# Altium PCB PCB_IR.PcbDoc
Units mm, origin at the board's own origin, x right, y up, seen from the top; angles counter-clockwise.
Board outline 74.42 x 67.06 mm, 2 copper layers (Top Layer, Bottom Layer); 11 components, 8 nets, 64 pads, 0 vias.
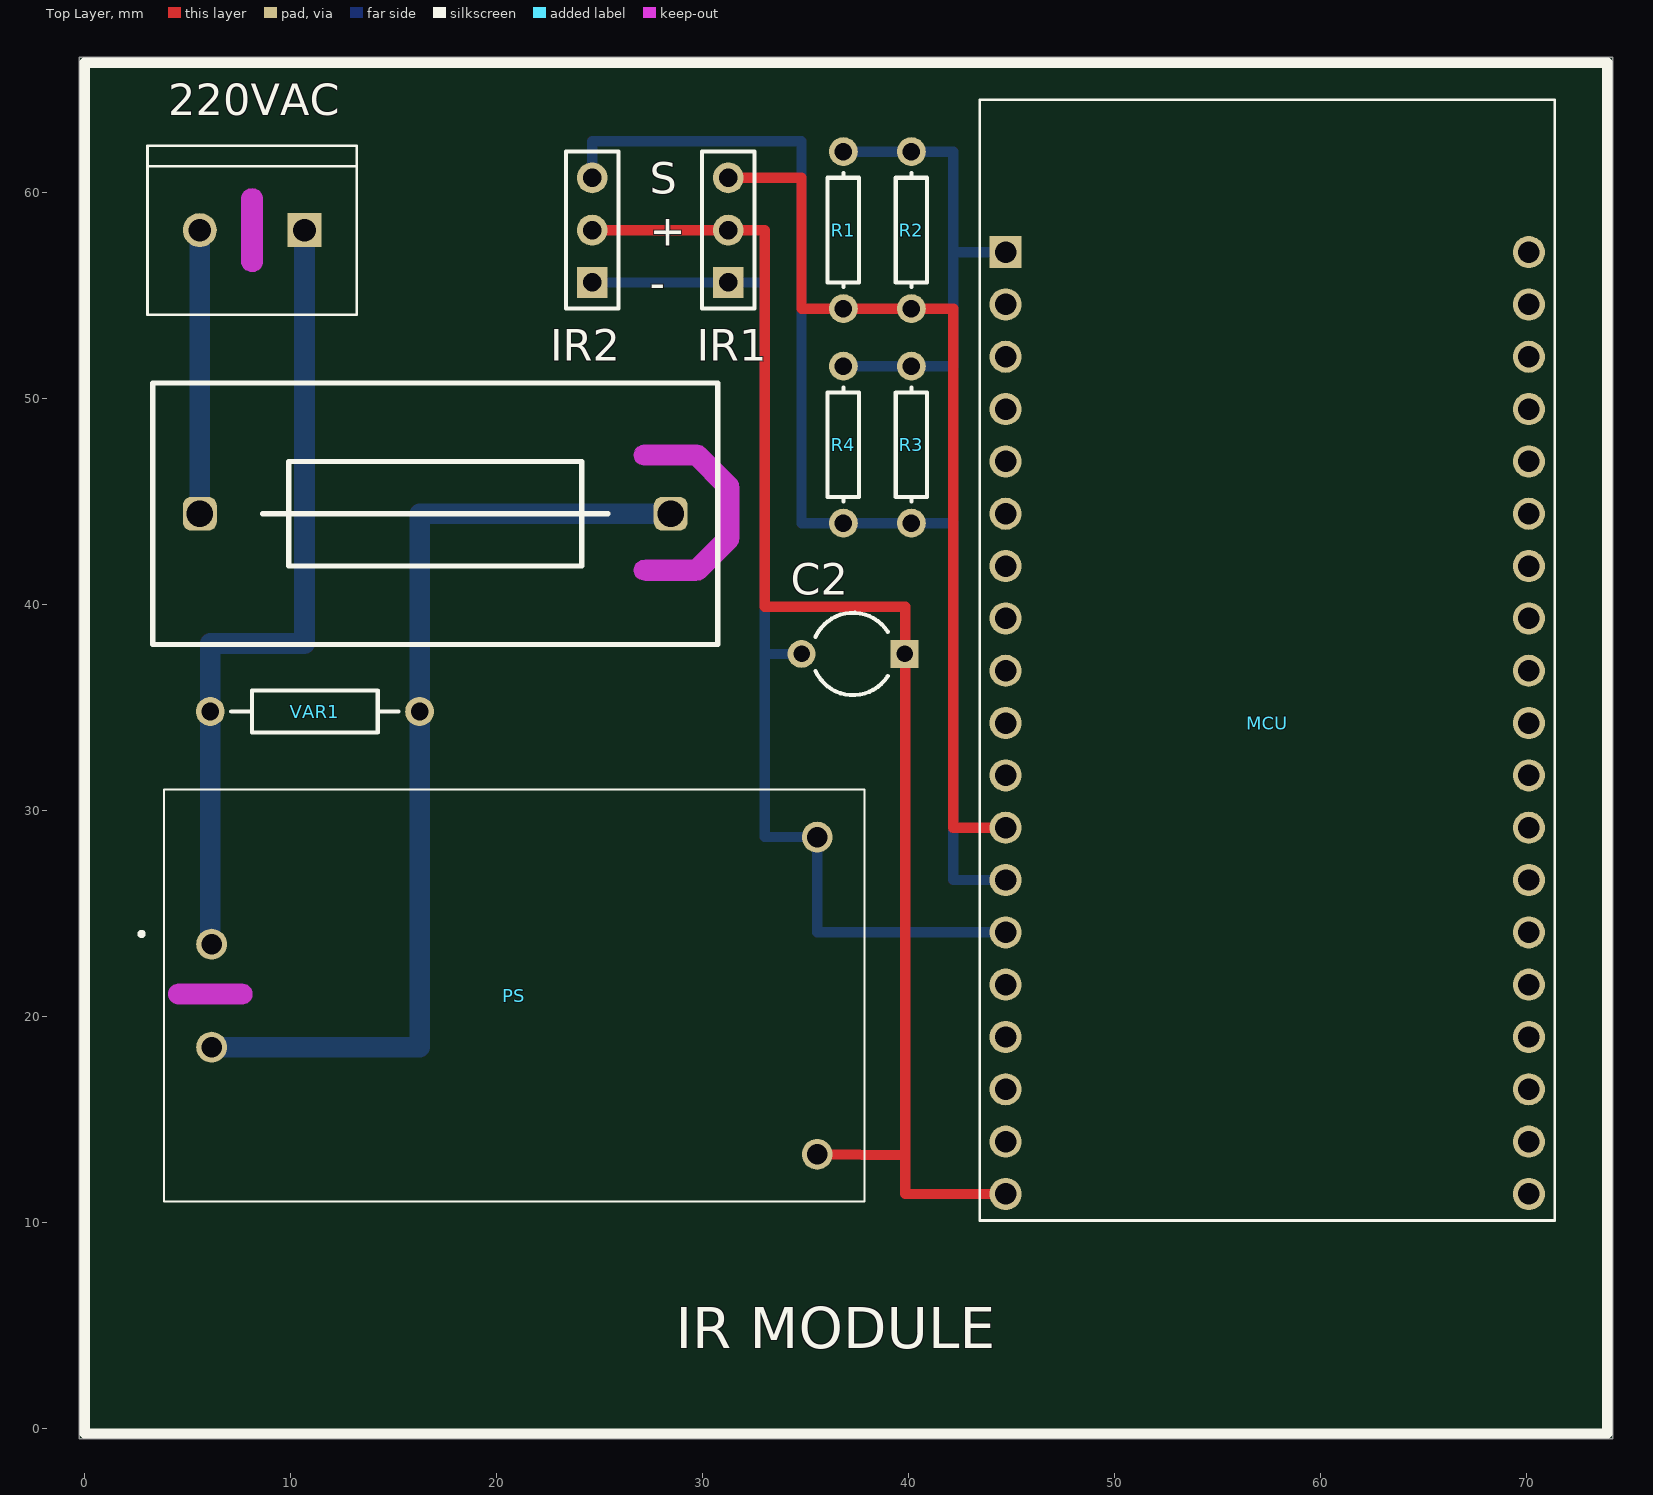
[diagram p0: Top Layer view]
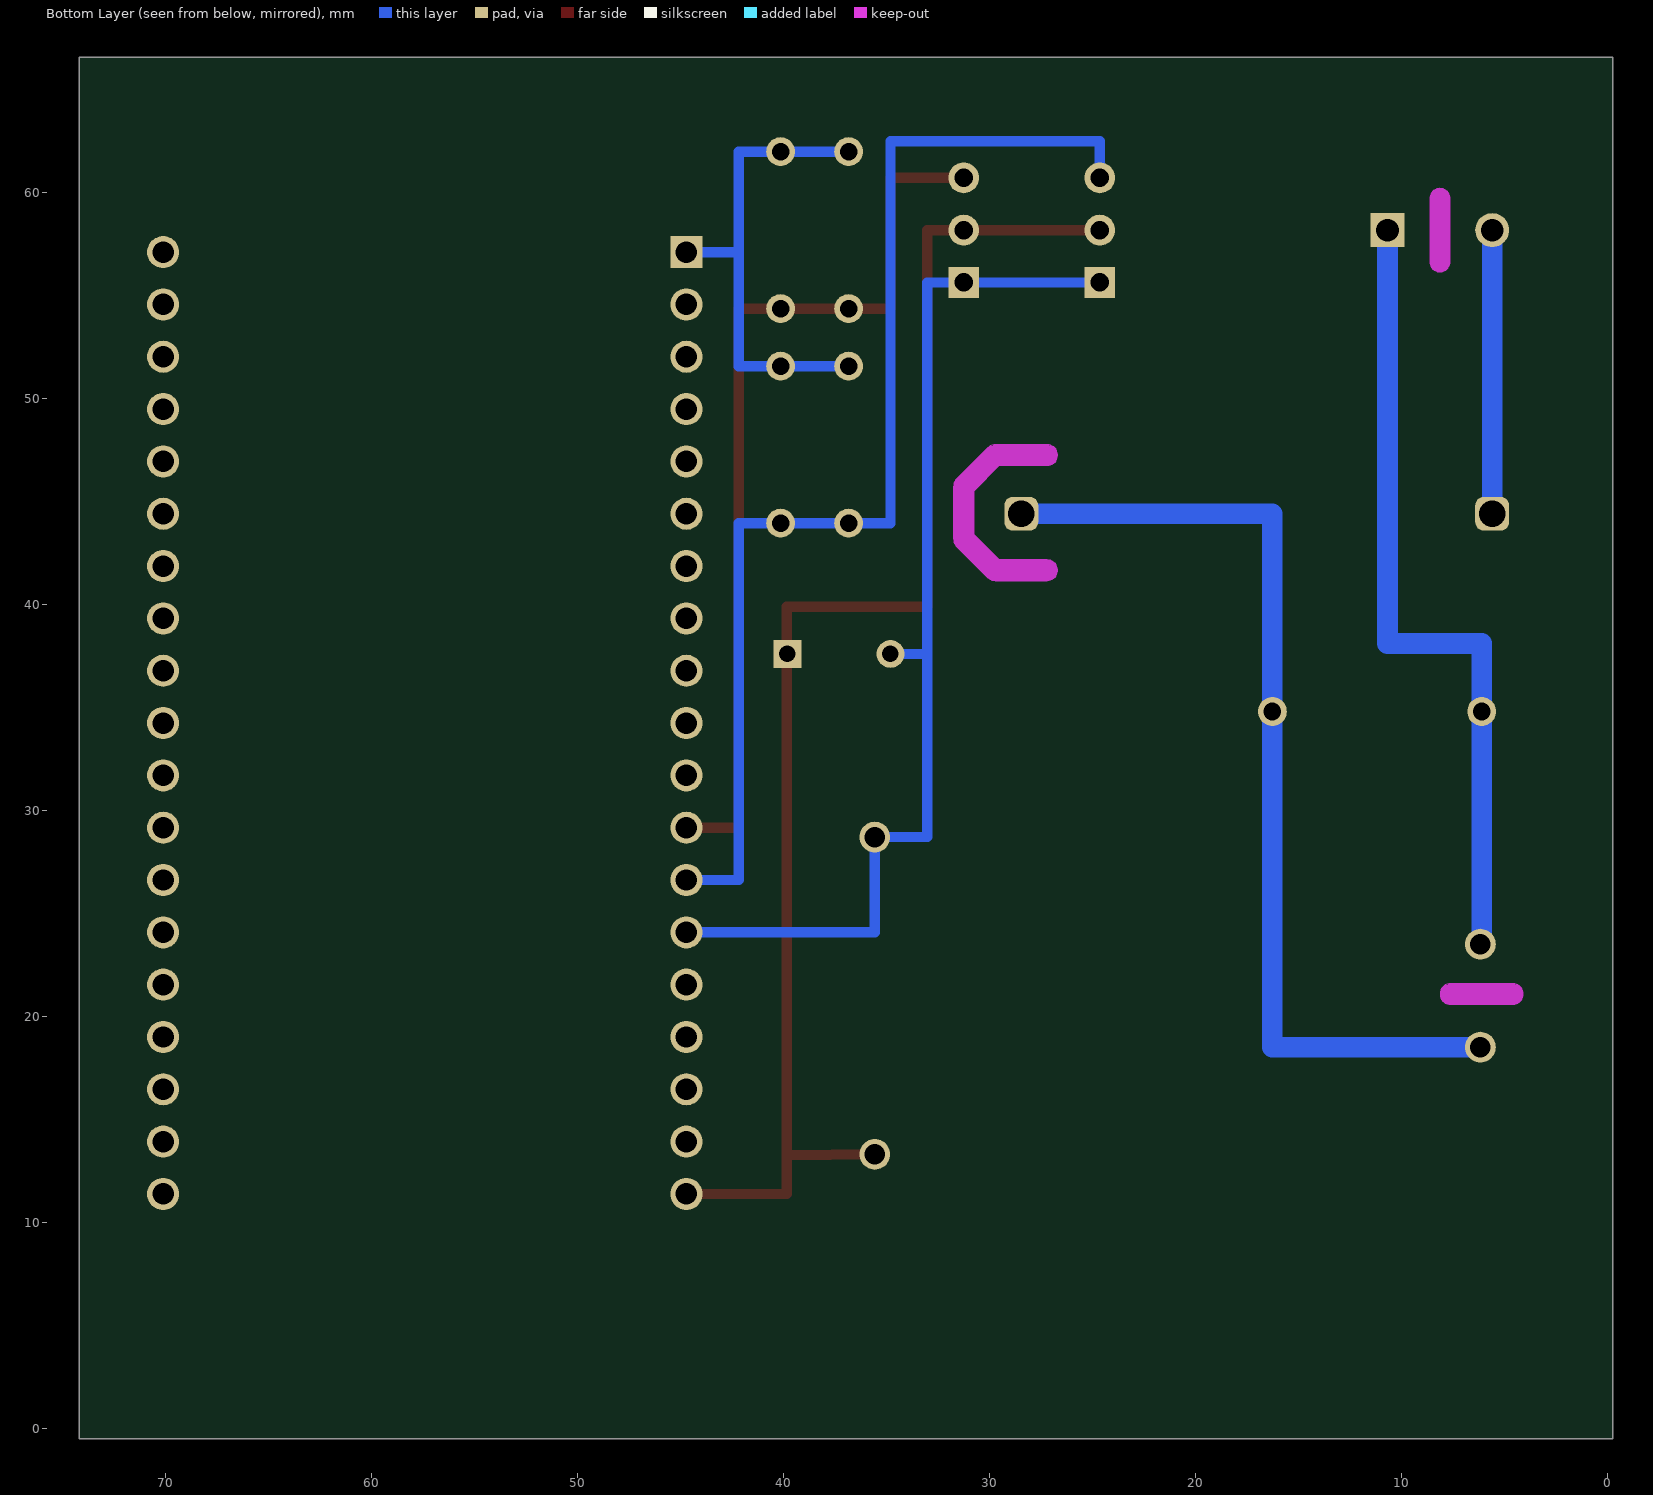
[diagram p1: Bottom Layer view, seen from below]

## Layer stack, top to bottom
Top Solder: solder mask 0.0102, Solder Resist, Dk 3.5
Top Layer: signal copper 0.0356
Dielectric 1: dielectric 0.32, FR-4, Dk 4.8
Bottom Layer: signal copper 0.0356
Bottom Solder: solder mask 0.0102, Solder Resist, Dk 3.5

## Board outline
-0.254,66.548 -0.254,-0.508 74.168,-0.508 74.168,66.548
cut-out: 27.178,42.156 29.511,42.156 30.742,43.387 30.742,45.513 29.511,46.744 27.178,46.744 cw(c27.178,47.244) 27.178,47.744 29.718,47.744 cw(c29.718,47.244) 30.072,47.598 31.596,46.074 cw(c31.242,45.72) 31.742,45.72 31.742,43.18 cw(c31.242,43.18) 31.596,42.826 30.072,41.302 cw(c29.718,41.656) 29.718,41.156 27.178,41.156 cw(c27.178,41.656)
cut-out: 7.62,21.582 cw(c7.62,21.082) 7.62,20.582 4.572,20.582 cw(c4.572,21.082) 4.072,21.082 cw(c4.572,21.082) 4.572,21.582
cut-out: 8.628,56.642 cw(c8.128,56.642) 7.628,56.642 7.628,59.69 cw(c8.128,59.69) 8.128,60.19 cw(c8.128,59.69) 8.628,59.69

## Design rules (kind name [scope] priority, off if disabled: settings)
Clearance [All] p1: gap=0.3 ignorepadtopadclearanceinfootprint=FALSE
PolygonConnect [All] p1: connectstyle=Relief reliefconductorwidth=0.254 reliefentries=4 polygonreliefangle="90 Angle" airgapwidth=0.254
RoutingVias [All] p1: holewidth=0.3 width=0.6 viastyle="Through Hole" minholewidth=0.3 minwidth=0.6 maxholewidth=0.3 maxwidth=0.6
SilkToSolderMaskClearance [IsPad] p1: minsilkscreentomaskgap=0.1 clearancetoexposedcopper=TRUE
SolderMaskExpansion [All] p1: expansion=0.102
Width [All] p1: maxlimit=1 minlimit=0.3 preferedwidth=0.5
29 further rules are at their usual default settings.

## Components (designator, comment, footprint, x,y, rotation, side; value= is the part's Value field where it differs from the comment)
220VAC "282837-2" TE_282837-2 8.128,58.166 r180 top
C2 "Cap2" CAPR5-4X5 37.298,37.592 r180 top value=470µF
IR1 "Header 2" HDR1X3 31.242,55.626 r90 top
IR2 "Header 3" HDR1X3 24.638,55.626 r90 top
MCU "ESP32-DEVKITC-32D" MODULE_ESP32-DEVKITC-32D 57.404,37.338 r0 top
PS "HLK-PM01" HLKPM01 6.16,23.502 r0 top
R1 "" AXIAL-0.3 36.83,58.166 r270 top value=10K
R2 "" AXIAL-0.3 40.132,58.166 r270 top value=10K
R3 "" AXIAL-0.3 40.132,47.752 r270 top value=10K
R4 "" AXIAL-0.3 36.83,47.752 r270 top value=10K
VAR1 "MOV-10D471K" AXIAL-0.4 11.176,34.798 r180 top value=1K

## Footprints (in the part's own frame and the unit in brackets; to place one, negate y for a bottom-side part, rotate by r counter-clockwise, add the part's x,y. Pads: shape width x height; smd on the part's side, far side on the other; paste and mask are expansions set on the pad)
AXIAL-0.3 [mm] "Axial Device, Thru-Hole; 2 Leads; 0.3 in Pin Spacing"
  round 1.4 hole 0.85: 1(-3.81,0) 2(3.81,0)
  silkscreen extent -2.77,-0.76 2.77,0.76
AXIAL-0.4 [mm] "Axial Device, Thru-Hole; 2 Leads; 0.4 in Pin Spacing"
  round 1.4 hole 0.85: 1(-5.08,0) 2(5.08,0)
  silkscreen extent -4.06,-1.02 4.06,1.02
CAPR5-4X5 [mm] "Capacitor; 2 Leads"
  rect 1.35x1.35 hole 0.8: 1(-2.5,0)
  round 1.35 hole 0.8: 2(2.5,0)
  silkscreen extent -1.69,-2 1.82,2
HDR1X3 [mm] "Connector; Header; 3 Position"
  rect 1.5x1.5 hole 0.9: 1(0,0)
  round 1.5 hole 0.9: 2(2.54,0) 3(5.08,0)
  silkscreen extent -1.27,-1.27 6.35,1.27
HLKPM01 [mm]
  round 1.5 hole 1: 1(0,0) 2(0,-5) 3(29.4,5.2) 4(29.4,-10.2)
  silkscreen extent -3.5,-12.5 31.7,7.5
MODULE_ESP32-DEVKITC-32D [mm]
  rect 1.56x1.56 hole 1.04: 1(-12.7,19.76)
  round 1.56 hole 1.04: 2(-12.7,17.22) 3(-12.7,14.68) 4(-12.7,12.14) 5(-12.7,9.6) 6(-12.7,7.06) 7(-12.7,4.52) 8(-12.7,1.98) 9(-12.7,-0.56) 10(-12.7,-3.1) 11(-12.7,-5.64) 12(-12.7,-8.18) 13(-12.7,-10.72) 14(-12.7,-13.26) 15(-12.7,-15.8) 16(-12.7,-18.34) 17(-12.7,-20.88) 18(-12.7,-23.42) 19(-12.7,-25.96) 20(12.7,19.76) 21(12.7,17.22) 22(12.7,14.68) 23(12.7,12.14) 24(12.7,9.6) 25(12.7,7.06) 26(12.7,4.52) 27(12.7,1.98) 28(12.7,-0.56) 29(12.7,-3.1) 30(12.7,-5.64) 31(12.7,-8.18) 32(12.7,-10.72) 33(12.7,-13.26) 34(12.7,-15.8) 35(12.7,-18.34) 36(12.7,-20.88) 37(12.7,-23.42) 38(12.7,-25.96)
  silkscreen extent -13.95,-27.25 13.95,27.15
TE_282837-2 [mm]
  rect 1.65x1.65 hole 1.1: 1(-2.54,0)
  round 1.65 hole 1.1: 2(2.54,0)
  silkscreen extent -5.08,-4.1 5.08,4.1

## Part data
220VAC: "Connector Terminal Blocks Receptacle 2 Position 5.08mm Solder Straight Thru-Hole 13.5A/Contact", Package=None, Digi-Key_Part_Number=A113320-ND, Digi-Key_Purchase_URL=https://www.digikey.in/product-detail/en/te-connectivity-amp-connectors/282837-2/A113320-ND/2187973?utm_source=snapeda&utm_medium=aggregator&utm_campaign=symbol, MF="TE Connectivity", MP=282837-2, SnapEDA_Link=https://www.snapeda.com/parts/282837-2/TE%20Connectivity%20AMP%20Connectors/view-part/2549980/?ref=snap, TE_purchase_URL=https://www.te.com/usa-en/product-282837-2.html?te_bu=Cor&te_type=disp&te_campaign=seda_glo_cor-seda-global-disp-prtnr-fy19-seda-model-bom-cta_sma-317_1&elqCampaignId=32493
C2: "Capacitor", PackageDescription="Capacitor; 2 Leads", PackageReference=CAPR5-4X5, Published=23-Sep-2002, Publisher="Altium Limited"
IR1: library part "Header 3", "Header, 3-Pin", LatestRevisionDate=17-Jul-2002, LatestRevisionNote="Re-released for DXP Platform.", Publisher="Altium Limited"
IR2: "Header, 3-Pin", LatestRevisionDate=17-Jul-2002, LatestRevisionNote="Re-released for DXP Platform.", Publisher="Altium Limited"
MCU: "- Transceiver; 802.11 b/g/n _Wi-Fi, WiFi, WLAN_, Bluetooth® Smart Ready 4.x Dual Mode For Use With ESP-WROOM-32", Package=None, Availability=Unavailable, MF="Espressif Systems", MP=ESP32-DEVKITC-32D, Price=None, SnapEDA_Link=https://www.snapeda.com/parts/ESP32-DEVKITC-32D/Espressif%20Systems/view-part/2777395/?ref=snap
PS: "<b>Ultra-compact power module</b><p> Source: <a href=\"https://datasheet.lcsc.com/szlcsc/1906201102_HI-LINK-HLK-PM03_C209904.pdf\"> Datasheet </a>", Package="Package Analog Devices", Availability=Unavailable, MF=Hi-link, MP=hlk-pm01, Price=None, SnapEDA_Link=https://www.snapeda.com/parts/hlk-pm01/Hi-link/view-part/2875605/?ref=snap
R1 R2 R3 R4: library part Res1, "Resistor", LatestRevisionDate=17-Jul-2002, LatestRevisionNote="Re-released for DXP Platform.", PackageDescription="Axial Device, Thru-Hole; 2 Leads; 0.3 in Pin Spacing", PackageReference=AXIAL-0.3, Published=8-Jun-2000, Publisher="Altium Limited"
VAR1: library part Res2, LatestRevisionDate=17-Jul-2002, LatestRevisionNote="Re-released for DXP Platform.", PackageDescription="Axial Device, Thru-Hole; 2 Leads; 0.4 in Pin Spacing", PackageReference=AXIAL-0.4, Published=8-Jun-2000, Publisher="Altium Limited"

## Free pads (board coordinates)
  rrect50% 1.65x1.65 hole 1.3: 6(28.448,44.398) 7(5.588,44.398)

## Nets (pads, with @x,y where several pads share a name; then routed paths per layer and width w, separated by ;. In a path a pad name is that pad's centre, name@x,y a point inside that pad or via, vN(x,y) a via of type N, cw(c..) or ccw(c..) an arc to the next point about the centre after c; other vN are vias at no path point)
5V: C2.1 IR1.2 IR2.2 MCU.19 PS.4 | length 70.6
  Top Layer w0.5: IR2.2@25.146,58.166 31.496,58.166 33.02,58.166 33.02,39.878 39.838,39.878 39.838,11.378 MCU.19 ; PS.4 39.798,13.25
GND: C2.2 IR1.1 IR2.1 MCU.14 PS.3 | length 53.4
  Bottom Layer w0.5: IR2.1 30.988,55.626 33.02,55.626 33.02,37.592 ; C2.2 33.02,37.592 ; MCU.14 35.56,24.078 PS.3 33.02,28.702 33.02,37.592
IR1: IR1.3 MCU.12 R1.2 R2.2 | length 45.3
  Top Layer w0.5: IR1.3@30.988,60.706 IR1.3 34.798,60.706 34.798,54.356 R1.2 R2.2 42.164,54.356 42.164,29.158 MCU.12
IR2: IR2.3 MCU.13 R3.2 R4.2 | length 57.7
  Bottom Layer w0.5: IR2.3 24.638,62.484 34.798,62.484 34.798,43.942 R4.2 R3.2 42.164,43.942 42.164,26.618 MCU.13
Net220VAC_1: 220VAC.1 PS.1 VAR1.2 | length 39.3
  Bottom Layer w0.5: PS.1@6.096,23.566 PS.1
  Bottom Layer w1: PS.1@6.096,23.566 VAR1.2 6.096,38.1 10.668,38.1 220VAC.1
Net220VAC_2: 220VAC.2 pad.7 | length 13.8
  Bottom Layer w1: pad.7 220VAC.2
NetF1_1: pad.6 PS.2 VAR1.1 | length 48.2
  Bottom Layer w1: PS.2 16.256,18.502 VAR1.1 16.256,44.398 pad.6
NetMCU_1: MCU.1 R1.1 R2.1 R3.1 R4.1 | length 23.6
  Bottom Layer w0.5: R4.1 R3.1 42.164,51.562 42.164,57.15 ; R1.1 R2.1 42.164,61.976 42.164,57.15 ; MCU.1 42.216,57.098 42.164,57.15
pads on no net: MCU.2 MCU.3 MCU.4 MCU.5 MCU.6 MCU.7 MCU.8 MCU.9 MCU.10 MCU.11 MCU.15 MCU.16 MCU.17 MCU.18 MCU.20 MCU.21 MCU.22 MCU.23 MCU.24 MCU.25 MCU.26 MCU.27 MCU.28 MCU.29 MCU.30 MCU.31 MCU.32 MCU.33 MCU.34 MCU.35 MCU.36 MCU.37 MCU.38

## Keep-outs
Keep-Out Layer:
  lines w1: 4.572,21.082 7.62,21.082 ; 8.128,56.642 8.128,59.69 ; 27.178,41.656 29.718,41.656 31.242,43.18 31.242,45.72 29.718,47.244 27.178,47.244

## Silkscreen, mask and mechanical layers (free items; w line width, h text height)
Top Overlay:
  lines w0.254: 8.636,44.398 25.4,44.398 ; 3.302,38.048 3.302,50.748 30.734,50.748 30.734,38.048 3.302,38.048 ; 9.906,41.858 24.13,41.858 24.13,46.938 9.906,46.938 9.906,41.858
  lines w0.5: 0,-0.254 73.914,-0.254 73.914,66.294 0,66.294 0,-0.254
  text "S" at 27.432,59.944 h1.52
  text "+" at 27.432,57.404 h1.52
  text "-" at 27.432,54.864 h1.52
  text "IR MODULE" at 28.702,3.877 h2